# Altium PCB ESP32_HID.PcbDoc
Units mm, origin at the board's own origin, x right, y up, seen from the top; angles counter-clockwise.
Board outline 200 x 80 mm, 2 copper layers (Top Layer, Bottom Layer), stack 1.569 mm thick; 48 components, 73 nets, 309 pads, 66 vias.
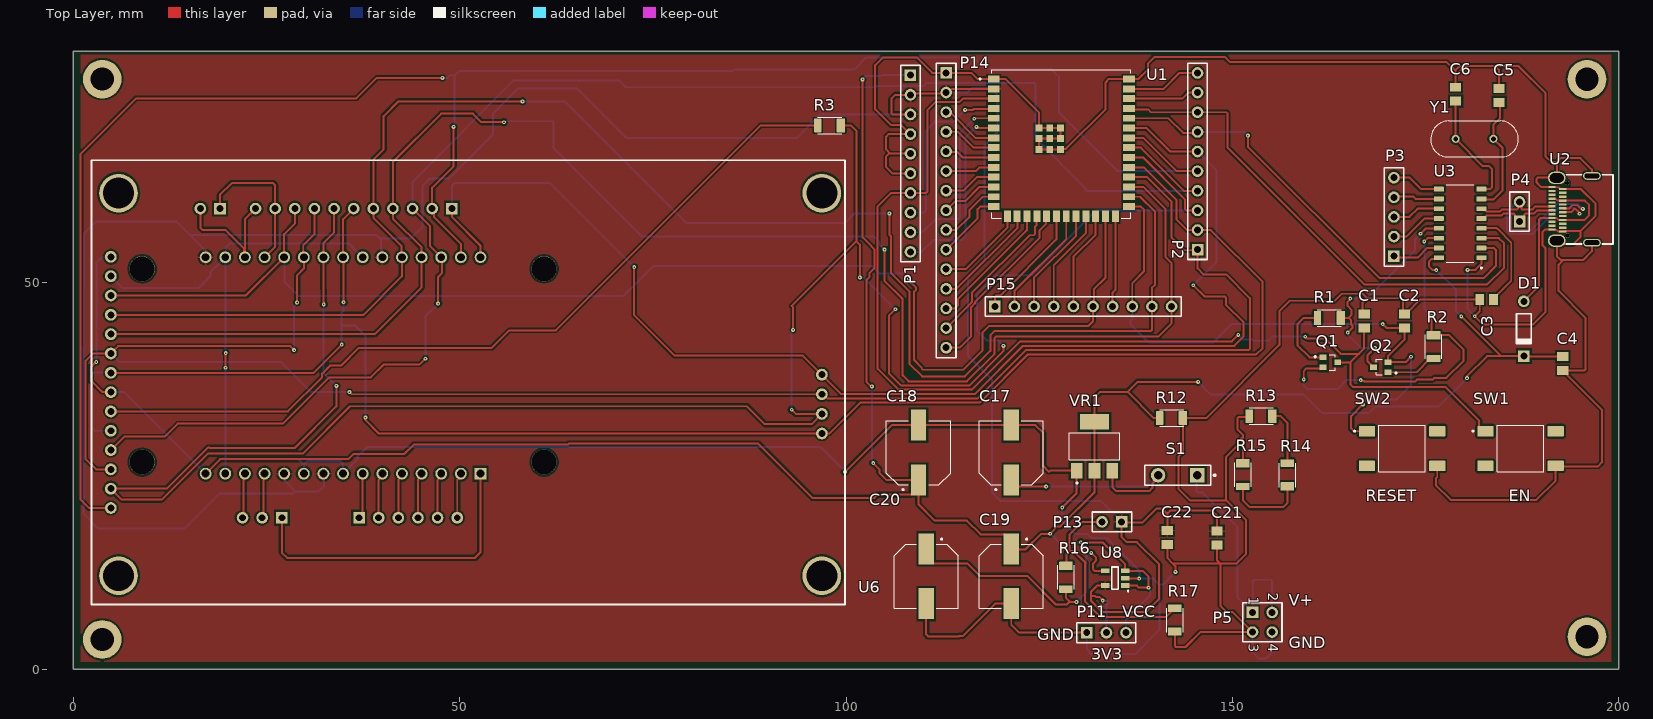
[diagram p0: Top Layer view]
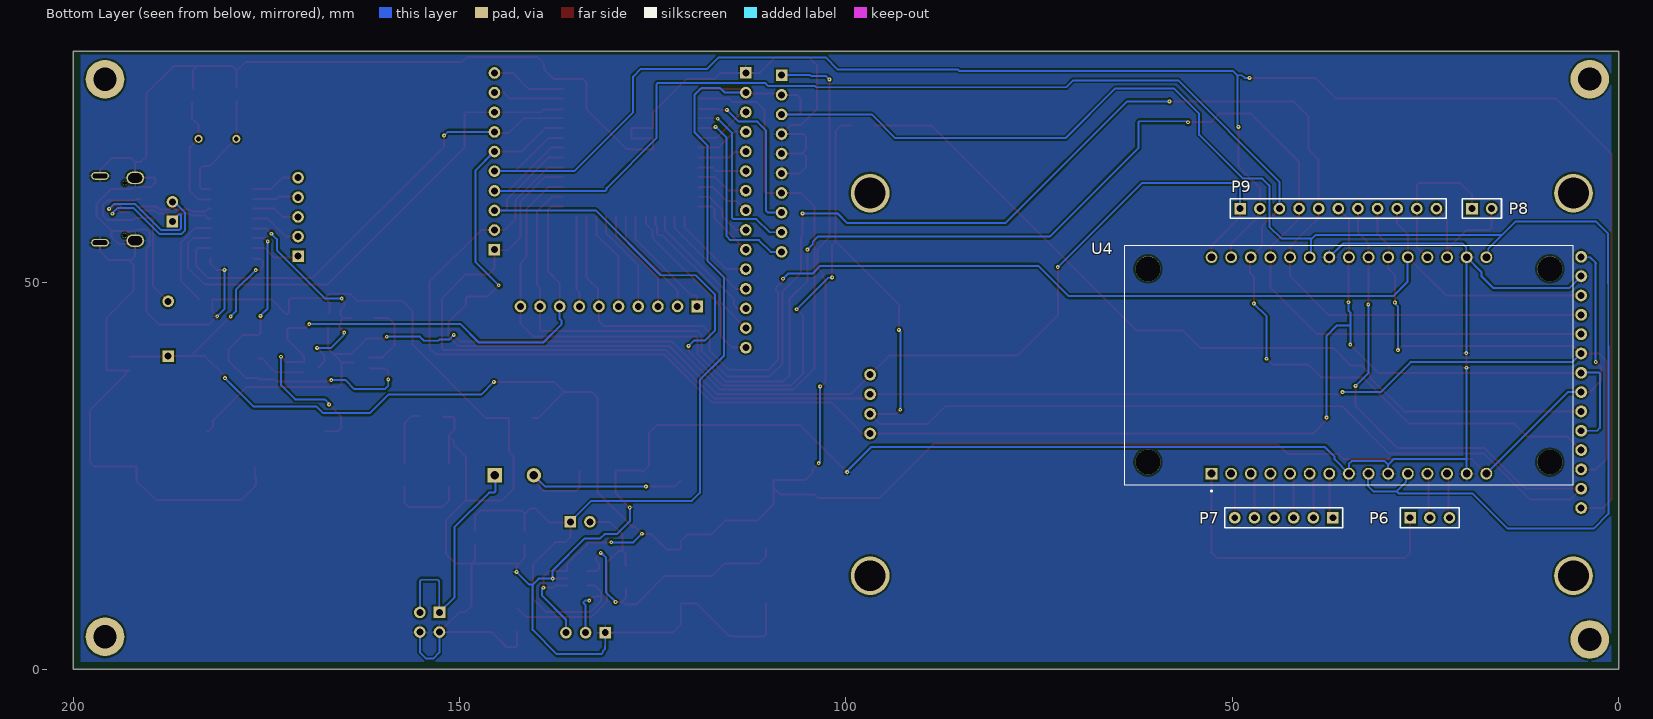
[diagram p1: Bottom Layer view, seen from below]

## Layer stack, top to bottom
Top Solder: solder mask 0.0254, SM-001, Dk 4
Top Layer: signal copper 0.035
Dielectric 1: core 1.4986, Core-043, Dk 4.3
Bottom Layer: signal copper 0.035
Bottom Solder: solder mask 0.0254, SM-001, Dk 4

## Board outline
0,0 200,0 200,80 0,80

## Design rules (kind name [scope] priority, off if disabled: settings)
Clearance [All] p1: gap=0.254 ignorepadtopadclearanceinfootprint=FALSE except(0: Arc-Hole Track-Hole SMDPad-Hole THPad-Hole Via-Hole Fill-Hole Poly-Hole Region-Hole Text-Hole; 0.127: Arc-Arc Arc-Track Arc-SMDPad Track-Track Track-SMDPad SMDPad-SMDPad SMDPad-THPad; 0.2: Arc-THPad Track-THPad)
DiffPairsRouting [All] p1: maxlimit=0.254 minlimit=0.127 mostfreqgap=0.254 toplayer_minwidth=0.254 toplayer_maxwidth=0.381 toplayer_prefwidth=0.381 bottomlayer_minwidth=0.254 bottomlayer_maxwidth=0.381 bottomlayer_prefwidth=0.381 maxuncoupledlength=12.7
MinimumSolderMaskSliver [All] p1: minsoldermaskwidth=0.08
PolygonConnect [All] p1: connectstyle=Relief reliefconductorwidth=0.254 reliefentries=4 polygonreliefangle="90 Angle" airgapwidth=0.254
RoomDefinition U_USB [InComponentClass('U_USB')] p1: confinementstyle=ConfineIn formatcopy=TRUE lockcomponents=FALSE outline 160.011,44.056 160.011,46.894 165.771,46.894 165.771,47.104 169.267,47.104 169.267,65.247 175.046,65.247 175.046,71.514 177.596,71.514 177.596,76.454 180.154,76.454 180.154,76.304 185.779,76.304 185.779,71.514 187.604,71.514 187.604,64.75 199.6,64.75 199.6,54.318 194.004,54.318 194.004,37.546 193.454,37.546 193.454,23.321 165.345,23.321 165.345,38.196 160.255,38.196 160.255,44.056
RoomDefinition U_ESP32_S2_solo [InComponentClass('U_ESP32_S2_solo')] p2: confinementstyle=ConfineIn formatcopy=TRUE lockcomponents=FALSE outline 114.584,40.001 111.336,40.001 111.336,52.401 106.711,52.401 106.711,78.509 111.336,78.509 111.336,78.809 114.584,78.809 114.584,78.794 147.109,78.794 147.109,52.686 143.744,52.686 143.744,45.336 114.584,45.336
RoomDefinition "U_Power Regulation" [InComponentClass('U_Power Regulation')] p3: confinementstyle=ConfineIn formatcopy=TRUE lockcomponents=FALSE outline 104.7,21.975 104.7,34.133 151.161,34.133 151.161,34.194 156.239,34.194 156.239,27.689 158.519,27.689 158.519,22.611 156.764,22.611 156.764,2.007 150.976,2.007 150.976,3.126 129.526,3.126 129.526,5.975 105.7,5.975 105.7,21.975
RoomDefinition U_NodeMCU [InComponentClass('U_NodeMCU')] p4: confinementstyle=ConfineIn formatcopy=TRUE lockcomponents=FALSE outline 4,22.624 4,55.357 14.836,55.357 14.836,61.248 21.976,61.248 50.624,61.248 50.624,55.357 64.458,55.357 64.458,22.624 51.324,22.624 51.324,18 28.624,18 20.296,18 20.296,22.624
RoomDefinition GLCD [InComponentClass('GLCD')] p5: confinementstyle=ConfineIn formatcopy=TRUE lockcomponents=FALSE outline 2,8 2,66.262 95.342,66.262 95.342,71.8 100.42,71.8 100.42,68.962 100.262,68.962 100.262,8
RoutingVias [All] p1: holewidth=0.2 width=0.5 viastyle="Through Hole" minholewidth=0.15 minwidth=0.2 maxholewidth=0.2 maxwidth=0.5
SolderMaskExpansion [All] p1: expansion=0.102 istentingtop=FALSE
UnRoutedNet [All] p1: checkbadconnections=TRUE
Width Width_1 [All] p1: maxlimit=0.254 minlimit=0.13 preferedwidth=0.254
27 further rules are at their usual default settings.

## Classes and differential pairs
component class "U_Power Regulation": C17 C18 C19 C20 C21 C22 P5 P11 P13 R12 R13 R14 R15 R16 R17 S1 U8 VR1
component class U_NodeMCU: P6 P7 P8 P9 U4
component class U_USB: C1 C2 C3 C4 C5 C6 D1 P3 P4 Q1 Q2 R1 R2 SW1 SW2 U2 U3 Y1
component class GLCD: R3 U6
component class U_ESP32_S2_solo: P1 P2 P14 P15 U1
differential pair D: +D_P -D_N

## Components (designator, comment, footprint, x,y, rotation, side; value= is the part's Value field where it differs from the comment)
C1 "0.1uf" CAPC2012X140N 167.05,45.075 r90 top
C2 "0.1uf" CAPC2012X140N 172.275,45.075 r90 top
C3 "0.1uf" CAPC2012X140N 182.9,47.875 r0 top
C4 "0.1uf" CAPC2012X140N 192.725,39.575 r90 top
C5 "33pf" CAPC2012X140N 184.5,74.275 r90 top
C6 "33pf" CAPC2012X140N 178.875,74.425 r90 top
C17 "EEEHA1V101UP" CAP_EEEHA1V101UP 121.379,28.054 r90 top
C18 "EEEHA1V101UP" CAP_EEEHA1V101UP 109.379,28.054 r90 top
C19 "EEEHA1V101UP" CAP_EEEHA1V101UP 121.379,12.054 r270 top
C20 "EEEHA1V101UP" CAP_EEEHA1V101UP 110.379,12.054 r270 top
C21 "0.1uf" CAPC2012X140N 148,17 r90 top
C22 "0.1uf" CAPC2012X140N 141.575,17.075 r90 top
D1 "Diode 1N4148" DO-35 187.7,44.075 r270 top
P1 "Header 10" HDR1X10 108.335,76.885 r270 top
P2 "Header 10" HDR1X10 145.485,54.31 r90 top
P3 "Header 5" HDR1X5 170.891,53.463 r90 top
P4 "Header 2" HDR1X2 187.147,57.959 r90 top
P5 "Header 2X2" HDR2X2 152.6,7.375 r270 top
P6 "Header 3" HDR1X3 27,19.624 r180 bottom
P7 "Header 6" HDR1X6 37,19.624 r0 bottom
P8 "Header 2" HDR1X2 19,59.624 r180 bottom
P9 "Header 11" HDR1X11 49,59.624 r180 bottom
P11 "Header 3" HDR1X3 131.15,4.75 r0 top
P13 "Header 2" HDR1X2 135.675,19.1 r180 top
P14 "Header 15" HDR1X15 112.96,77.185 r270 top
P15 "Header 10" HDR1X10 119.26,46.96 r0 top
Q1 "BC846BW_RF" TRANS_BC846BW_RF 162.675,39.725 r0 top
Q2 "BC846BW_RF" TRANS_BC846BW_RF 169.2,39.1 r180 top
R1 "10k" RESC3115X65N 162.55,45.475 r180 top
R2 "10k" RESC3115X65N 176.025,41.775 r270 top
R3 "10k" RESC3115X65N 97.881,70.381 r180 top
R12 "1k" RESC3115X65N 142.125,32.525 r180 top
R13 "1k" RESC3115X65N 153.7,32.775 r180 top
R14 "1k" RESC3115X65N 157.1,25.15 r90 top
R15 "1k" RESC3115X65N 151.35,25.2 r270 top
R16 "0 ohm" RESC3115X65N 128.45,11.925 r270 top
R17 "1k" RESC3115X65N 142.55,6.375 r90 top
S1 "SW-SPST" SPST-2 142.925,25.125 r180 top
SW1 "FSM4JSMA" TE_FSM4JSMA 187.275,28.575 r0 top
SW2 "FSM4JSMA" TE_FSM4JSMA 171.95,28.575 r0 top
U1 "ESP32-S2-SOLO-U-N4R2" XCVR_ESP32-S2-SOLO-U-N4R2 127.86,67.985 r0 top
U2 "USB-TYPE-C-FEMAIL" C5156605 195.199,60.423 r90 top
U3 "CH340G" SOIC127P600X180-16N 179.451,57.705 r180 top
U4 "VMA107" MODULE_VMA107 34.929,39.328 r90 bottom
U6 "3.5 Inch TFT LCD Module With Touch" PCBCOMPONENT_1 4.881,53.381 r0 top
U8 "MIC5205-2.5YM5-TR" SOT95P280X145-5N 134.825,11.8 r180 top
VR1 "NCP1117STAT3G" VREG_NCP1117STAT3G 132.15,28.875 r90 top
Y1 "12MHZ" XTAL_ECS-51-S-1 181.325,68.65 r0 top

## Footprints (in the part's own frame and the unit in brackets; to place one, negate y for a bottom-side part, rotate by r counter-clockwise, add the part's x,y. Pads: shape width x height; smd on the part's side, far side on the other; paste and mask are expansions set on the pad)
C5156605 [mm] "USB-C-FMAIL"
  oval 1x2.3 hole 0.6 slot 1.9 at 90 deg: 15(-5.209,-1.318) 16(3.431,-1.318)
  oval 1.6x2.3 hole 1.2 slot 1.8 at 90 deg: 17(3.171,3.232) 18(-4.949,3.232)
  rect 0.3x0.95 smd: A1(-3.514,3.858) A2(-3.014,3.858) A3(-2.514,3.858) A4(-2.014,3.858) A5(-1.514,3.858) A6(-1.014,3.858) A7(-0.514,3.858) A8(-0.014,3.858) A9(0.486,3.858) A10(0.986,3.858) A11(1.486,3.858) A12(1.986,3.858) B1(1.736,2.458) B2(1.236,2.458) B3(0.736,2.458) B4(0.236,2.458) B5(-0.264,2.458) B6(-0.764,2.458) B7(-1.264,2.458) B8(-1.764,2.458) B9(-2.264,2.458) B10(-2.764,2.458) B11(-3.264,2.458) B12(-3.764,2.458)
  round 0.55 hole 0.55 unplated: ""(-4.289,1.882) ""(2.511,1.882)
  silkscreen extent -5.36,-4.02 3.58,2.01
CAP_EEEHA1V101UP [mm]
  rect 4x2 smd: 1(-3.55,0) 2(3.55,0)
  silkscreen extent -4.9,-4.15 4.15,4.15, body extent -4.85,-4.15 4.85,4.15, height 10.2
CAPC2012X140N [mm]
  rect 1.15x1.45 smd: 1(-0.9,0) 2(0.9,0)
  body extent -1,-0.63 1,0.63, height 0.94
DO-35 [mm] "Diode, Axial; Body 3.8 x 1.9 mm (LxDia. max), Lead Dia. 0.53 mm (max)"
  round 1.5 hole 0.9: 1(-3.55,0)
  rect 1.5x1.5 hole 0.9: 2(3.55,0)
  silkscreen extent -1.95,-0.95 2.05,0.95
HDR1X2 [mm] "Connector; Header; 2 Position"
  rect 1.5x1.5 hole 0.9: 1(0,0)
  round 1.5 hole 0.9: 2(2.54,0)
  silkscreen extent -1.27,-1.27 3.81,1.27
HDR1X3 [mm] "Connector; Header; 3 Position"
  rect 1.5x1.5 hole 0.9: 1(0,0)
  round 1.5 hole 0.9: 2(2.54,0) 3(5.08,0)
  silkscreen extent -1.27,-1.27 6.35,1.27
HDR1X5 [mm] "Connector; Header; 5 Position"
  rect 1.5x1.5 hole 0.9: 1(0,0)
  round 1.5 hole 0.9: 2(2.54,0) 3(5.08,0) 4(7.62,0) 5(10.16,0)
  silkscreen extent -1.27,-1.27 11.43,1.27
HDR1X6 [mm] "Connector; Header; 6 Position"
  rect 1.5x1.5 hole 0.9: 1(0,0)
  round 1.5 hole 0.9: 2(2.54,0) 3(5.08,0) 4(7.62,0) 5(10.16,0) 6(12.7,0)
  silkscreen extent -1.27,-1.27 13.97,1.27
HDR1X10 [mm] "Connector; Header; 10 Position"
  rect 1.5x1.5 hole 0.9: 1(0,0)
  round 1.5 hole 0.9: 2(2.54,0) 3(5.08,0) 4(7.62,0) 5(10.16,0) 6(12.7,0) 7(15.24,0) 8(17.78,0) 9(20.32,0) 10(22.86,0)
  silkscreen extent -1.27,-1.27 24.13,1.27
HDR1X11 [mm] "Connector; Header; 11 Position"
  rect 1.5x1.5 hole 0.9: 1(0,0)
  round 1.5 hole 0.9: 2(2.54,0) 3(5.08,0) 4(7.62,0) 5(10.16,0) 6(12.7,0) 7(15.24,0) 8(17.78,0) 9(20.32,0) 10(22.86,0) 11(25.4,0)
  silkscreen extent -1.27,-1.27 26.67,1.27
HDR1X15 [mm] "Connector; Header; 15 Position"
  rect 1.5x1.5 hole 0.9: 1(0,0)
  round 1.5 hole 0.9: 2(2.54,0) 3(5.08,0) 4(7.62,0) 5(10.16,0) 6(12.7,0) 7(15.24,0) 8(17.78,0) 9(20.32,0) 10(22.86,0) 11(25.4,0) 12(27.94,0) 13(30.48,0) 14(33.02,0) 15(35.56,0)
  silkscreen extent -1.27,-1.27 36.83,1.27
HDR2X2 [mm] "Connector; Header; 2x2 Position"
  rect 1.5x1.5 hole 0.9: 1(0,0)
  round 1.5 hole 0.9: 2(0,2.54) 3(2.54,0) 4(2.54,2.54)
  silkscreen extent -1.27,-1.27 3.81,3.81
MODULE_VMA107 [mm]
  rect 1.53x1.53 hole 1.02: 1(-14,17.78)
  round 1.53 hole 1.02: 2(-14,15.24) 3(-14,12.7) 4(-14,10.16) 5(-14,7.62) 6(-14,5.08) 7(-14,2.54) 8(-14,0) 9(-14,-2.54) 10(-14,-5.08) 11(-14,-7.62) 12(-14,-10.16) 13(-14,-12.7) 14(-14,-15.24) 15(-14,-17.78) 16(14,-17.78) 17(14,-15.24) 18(14,-12.7) 19(14,-10.16) 20(14,-7.62) 21(14,-5.08) 22(14,-2.54) 23(14,0) 24(14,2.54) 25(14,5.08) 26(14,7.62) 27(14,10.16) 28(14,12.7) 29(14,15.24) 30(14,17.78)
  round 3.25 hole 3.25 unplated: ""(-12.5,-26) ""(-12.5,26) ""(12.5,-26) ""(12.5,26)
  silkscreen extent -16.35,-29 15.5,29
PCBCOMPONENT_1 [mm]
  round 1.524 hole 0.9: 1(0,0) 2(0,-2.5) 3(0,-5) 4(0,-7.5) 5(0,-10) 6(0,-12.5) 7(0,-15) 8(0,-17.5) 9(0,-20) 10(0,-22.5) 11(0,-25) 12(0,-27.5) 13(0,-30) 14(0,-32.5) 15(92,-22.86) 16(92,-20.32) 17(92,-17.78) 18(92,-15.24)
  round 5 hole 4: ""(1,-41.26) ""(1,8.24) ""(92,-41.26) ""(92,8.24)
  silkscreen extent -2.5,-45 95,12.5
RESC3115X65N [mm]
  rrect14% 1.09x1.77 smd: 1(-1.465,0)
  rrect14% 0.94x1.77 smd: 2(1.54,0)
  silkscreen extent -1.55,-1.07 1.55,1.06
SOIC127P600X180-16N [mm]
  rrect25% 1.31x0.62 smd: 1(-2.75,4.445) 2(-2.75,3.175) 3(-2.75,1.905) 4(-2.75,0.635) 5(-2.75,-0.635) 6(-2.75,-1.905) 7(-2.75,-3.175) 8(-2.75,-4.445) 9(2.75,-4.445) 10(2.75,-3.175) 11(2.75,-1.905) 12(2.75,-0.635) 13(2.75,0.635) 14(2.75,1.905) 15(2.75,3.175) 16(2.75,4.445)
  silkscreen extent -2.85,-5 1.77,5.85, body extent -3,-5 3,5, height 1.8
SOT95P280X145-5N [mm]
  rect 1.1x0.6 smd: 1(-1.3,0.95) 2(-1.3,0) 3(-1.3,-0.95) 4(1.3,-0.95) 5(1.3,0.95)
  silkscreen extent -1.78,-1.45 0.42,1.77, body extent -1.45,-1.35 1.45,1.35, height 1.45
SPST-2 [mm] "Switch; 2 Leads"
  rect 1.85x1.85 hole 1.1: 1(-2.54,0)
  round 1.85 hole 1.1: 2(2.54,0)
  silkscreen extent -4.89,-1.27 4.28,1.27
TE_FSM4JSMA [mm]
  rrect15% 2.1x1.38 smd: 1(-4.55,2.24) 2(4.55,2.24) 3(-4.55,-2.24) 4(4.55,-2.24)
  silkscreen extent -6.25,-3 3,3, body extent -3,-5 3,5, height 4.98
TRANS_BC846BW_RF [mm]
  rect 0.9x0.7 smd: 1(-0.95,0.65) 2(-0.95,-0.65) 3(0.95,0)
  silkscreen extent -2.07,-1 0.62,1, body extent -1.05,-1 1.05,1, height 1.1
VREG_NCP1117STAT3G [mm]
  rect 2x1.5 smd: 1(-3.15,2.3) 2(-3.15,0) 3(-3.15,-2.3)
  rect 2x3.8 smd: 4(3.15,0)
  silkscreen extent -4.85,-3.25 1.75,3.25, body extent -3.5,-3.25 3.5,3.25, height 1.8
XCVR_ESP32-S2-SOLO-U-N4R2 [mm]
  rect 1.5x0.9 smd: 1(-8.75,8.41) 2(-8.75,7.14) 3(-8.75,5.87) 4(-8.75,4.6) 5(-8.75,3.33) 6(-8.75,2.06) 7(-8.75,0.79) 8(-8.75,-0.48) 9(-8.75,-1.75) 10(-8.75,-3.02) 11(-8.75,-4.29) 12(-8.75,-5.56) 13(-8.75,-6.83) 14(-8.75,-8.1) 27(8.75,-8.1) 28(8.75,-6.83) 29(8.75,-5.56) 30(8.75,-4.29) 31(8.75,-3.02) 32(8.75,-1.75) 33(8.75,-0.48) 34(8.75,0.79) 35(8.75,2.06) 36(8.75,3.33) 37(8.75,4.6) 38(8.75,5.87) 39(8.75,7.14) 40(8.75,8.41)
  rect 0.9x1.5 smd: 15(-6.985,-9.35) 16(-5.715,-9.35) 17(-4.445,-9.35) 18(-3.175,-9.35) 19(-1.905,-9.35) 20(-0.635,-9.35) 21(0.635,-9.35) 22(1.905,-9.35) 23(3.175,-9.35) 24(4.445,-9.35) 25(5.715,-9.35) 26(6.985,-9.35)
  rect 0.9x0.9 smd: 41_1(-2.9,2.09) 41_2(-1.5,2.09) 41_3(-0.1,2.09) 41_4(-2.9,0.69) 41_5(-1.5,0.69) 41_6(-0.1,0.69) 41_7(-2.9,-0.71) 41_8(-1.5,-0.71) 41_9(-0.1,-0.71)
  silkscreen extent -10.6,-9.6 9,9.6
XTAL_ECS-51-S-1 [mm]
  round 1.03 hole 0.63: 1(-2.44,0) 2(2.44,0)
  silkscreen extent -5.68,-2.33 5.68,2.33, body extent -5.47,-2.5 5.88,2.5, height 13.46

## Part data
C1 C2 C3 C4 C5 C6 C21 C22: library part LD051A121KAB2A, "120PF 100V 10% 0805", Package=None, Availability=Unavailable, MF="{'manufacturer': u'AVX'}", MP=LD051A121KAB2A, Price=None
C17 C18 C19 C20 Q1 Q2 U1 U3: Package=None, Availability=Unavailable, Price=None
  C17 C18 C19 C20: MF="{'manufacturer': u'Panasonic'}", MP=EEEHA1V101UP
  Q1 Q2: MF="{'manufacturer': u'Taiwan Semiconductor'}", MP=BC846BW_RF
  U1: MF="{'manufacturer': u'Espressif Systems'}", MP=ESP32-S2-SOLO-U-N4R2
  U3: MF="{'manufacturer': u'WCH'}", MP=CH340G
D1: "High Conductance Fast Diode", Code_JEDEC=DO-204-AH, ComponentLink1Description="Manufacturer Link", ComponentLink1URL=http://www.fairchildsemi.com/, ComponentLink2Description=Datasheet, ComponentLink2URL=http://www.fairchildsemi.com/ds/1N%2F1N4148.pdf, DatasheetVersion=1997, LatestRevisionDate=17-Jul-2002, LatestRevisionNote="Re-released for DXP Platform.", PackageDescription="Diode, Axial; Body 3.8 x 1.9 mm (LxDia. max), Lead Dia. 0.53 mm (max)", PackageReference=DO-35, Published=8-Jun-2000, Publisher="Altium Limited"
P1 P2 P15: "Header, 10-Pin", LatestRevisionDate=17-Jul-2002, LatestRevisionNote="Re-released for DXP Platform.", Publisher="Altium Limited"
P3: "Header, 5-Pin", LatestRevisionDate=17-Jul-2002, LatestRevisionNote="Re-released for DXP Platform.", Publisher="Altium Limited"
P4 P8 P13: "Header, 2-Pin", LatestRevisionDate=17-Jul-2002, LatestRevisionNote="Re-released for DXP Platform.", Publisher="Altium Limited"
P5: "Header, 2-Pin, Dual row", LatestRevisionDate=17-Jul-2002, LatestRevisionNote="Re-released for DXP Platform.", Publisher="Altium Limited"
P6 P11: "Header, 3-Pin", LatestRevisionDate=17-Jul-2002, LatestRevisionNote="Re-released for DXP Platform.", Publisher="Altium Limited"
P7: "Header, 6-Pin", LatestRevisionDate=17-Jul-2002, LatestRevisionNote="Re-released for DXP Platform.", Publisher="Altium Limited"
P9: "Header, 11-Pin", LatestRevisionDate=17-Jul-2002, LatestRevisionNote="Re-released for DXP Platform.", Publisher="Altium Limited"
P14: "Header, 15-Pin", LatestRevisionDate=17-Jul-2002, LatestRevisionNote="Re-released for DXP Platform.", Publisher="Altium Limited"
R1 R2 R3 R12 R13 R14 R15 R16 R17: library part 1-1879462-4, "RL73H 2B R43 1% 10 RL", Package=None, Availability=Unavailable, MF="{'manufacturer': u'TE Connectivity'}", MP=1-1879462-4, Price=None
S1: "Single-Pole, Single-Throw Switch", LatestRevisionDate=17-Jul-2002, LatestRevisionNote="Re-released for DXP Platform.", PackageDescription="Switch; 2 Leads", PackageReference=SPST-2, Published=24-Mar-1999, Publisher="Altium Limited"
SW1 SW2: "Switch Tactile OFF (ON) SPST Round Button Gull Wing 0.05A 24VDC 2.6N SMD T/R", Package=None, Availability=Unavailable, MF="{'manufacturer': u'TE Connectivity'}", MP=FSM4JSMA, Price=None
U4: "NodeMCU V2 Lua Based ESP8266 Development Board", Package=None, Availability=Unavailable, MF="{'manufacturer': u'Velleman'}", MP=VMA107, Price=None
U6: library part ILI9488, ComponentLink1Description="New link", ComponentLink1URL=https://www.aliexpress.com/item/32954128438.html?spm=a2g0o.order_list.order_list_main.44.5fd61802HfjXd0
U8: "MIC5205 Series 3 V Fixed Output 150 mA SMT Low-Noise LDO Regulator - SOT-23-5", Package=None, Availability=Unavailable, MF="{'manufacturer': u'Microchip Technology'}", MP=MIC5205-2.5YM5-TR, Price=None
VR1: "Linear Voltage Regulator IC 1 Output 1A SOT-223", Package=None, Availability=Unavailable, MF="{'manufacturer': u'ON Semiconductor'}", MP=NCP1117STAT3G, Price=None
Y1: library part ECS-51-S-1, Package=None, Availability=Unavailable, MF="{'manufacturer': u'ECS'}", MP=ECS-51-S-1, Price=None

## Free pads (board coordinates)
  round 5 hole 3: 22(3.775,76.375) 23(195.875,76.35) 24(195.875,4.225) 25(3.775,3.875)

## Via types
v1: diameter 0.5, hole 0.2, Top Layer to Bottom Layer, 66 vias

## Nets (pads, with @x,y where several pads share a name; then routed paths per layer and width w, separated by ;. In a path a pad name is that pad's centre, name@x,y a point inside that pad or via, vN(x,y) a via of type N, cw(c..) or ccw(c..) an arc to the next point about the centre after c; other vN are vias at no path point)
3V3: C21.2 C22.2 P1.2 P1.3 P11.2 P13.1 P14.2 U1.2 U4.9 U4.11 U4.16 U4.25 U8.5 | length 355.4
  Top Layer w0.254: P1.3 106.024,71.805 105.875,71.954 105.875,73.825 106.395,74.345 P1.2 108.485,74.495 112.81,74.495 P14.2 113.297,74.645 113.777,75.125 U1.2 ; v1(133.225,8.9) 132.75,9.375 132.325,9.375 132.213,9.487 131.7,9.487 ; U8.5 132.475,10.85 131.7,10.075 131.7,9.487 ; C22.2 141.575,20.175 ; C21.2 148,19.875 147.325,20.55 141.95,20.55 141.575,20.175 ; 131.7,9.487 131.7,8.9 133.175,7.425 138.8,7.425 140.5,9.125 140.5,13.6 137.625,16.475 136.3,16.475 135.675,17.1 P13.1 135.775,19 138.35,19 140.15,20.8 140.9,20.8 141.525,20.175 141.575,20.175
  Bottom Layer w0.254: U4.16 16.905,53.572 16.905,54.445 15.152,56.198 ; U4.11 27.553,25.084 27.553,24.222 28.75,23.025 ; U4.9 32.389,25.039 32.3,24.95 32.45,24.8 32.45,23.7 31.775,23.025 28.75,23.025 ; U4.25 39.85,53.487 39.85,55.725 ; P1.3 96.68,71.805 93.625,68.75 71.6,68.75 65.175,75.175 57.575,75.175 54.3,71.9 54.3,69.175 48.625,63.5 46.125,63.5 45.213,62.587 45.213,57.288 43.65,55.725 39.85,55.725 ; P14.2 115.709,74.645 116.289,75.225 118.7,75.225 119.6,74.325 119.6,69.475 117.925,67.8 117.925,52.85 115.8,50.725 115.8,40.55 118.9,37.45 118.9,22.85 119.95,21.8 132.975,21.8 P13.1 ; v1(133.225,8.9) 133.792,8.9 133.941,8.751 133.941,8.541 133.69,8.29 P11.2 ; 15.152,56.198 13.4,57.95 2.95,57.95 1.85,56.85 1.85,56.825 1.4,56.375 1.4,49.9 1.375,49.875 1.375,41.875 1.35,41.85 1.35,20.125 3.25,18.225 14.4,18.225 18.95,22.775 28.5,22.775 28.75,23.025 ; 15.152,56.198 39.277,56.198 39.8,55.675 39.85,55.725
AIN1: P14.3 U1.7 | length 7.5
  Top Layer w0.254: P14.3 113.198,71.867 113.658,71.867 116.75,68.775 U1.7
AIN1_2: P15.2 U1.21 | length 14.4
  Top Layer w0.254: P15.2 121.8,48.975 128.495,55.67 U1.21
AIN2: P1.10 U1.6 | length 25
  Top Layer w0.254: v1(116.875,70.2) 117.03,70.045 U1.6
  Bottom Layer w0.254: P1.10 109.75,54.025 111.275,55.55 114.95,55.55 115.45,56.05 115.45,68.775 v1(116.875,70.2)
AIN2_2: P15.1 U1.20 | length 15.3
  Top Layer w0.254: P15.1 119.26,48.21 119.41,48.36 119.935,48.36 127.225,55.65 U1.20
BIN1: P1.9 U1.5 | length 23.3
  Top Layer w0.254: v1(116.6,71.25) 116.665,71.315 U1.5
  Bottom Layer w0.254: P1.9 109.89,56.565 111.6,58.275 114.576,58.275 114.725,58.424 114.725,69.375 v1(116.6,71.25)
BIN1_2: P14.15 U1.19 | length 23.4
  Top Layer w0.254: P14.15 114.7,41.625 116.2,43.125 116.2,46.866 116.681,47.347 116.681,47.481 125.01,55.81 125.01,56.76 125.903,57.653 125.903,58.583 U1.19
BIN2: P1.8 U1.4 | length 22.5
  Top Layer w0.254: v1(115.4,72.4) 116.425,72.4 116.55,72.525 119.05,72.525 U1.4
  Bottom Layer w0.254: P1.8 110.105,59.105 110.325,59.325 110.325,69.725 111.475,70.875 113.875,70.875 v1(115.4,72.4)
BIN2_2: P14.14 U1.18 | length 19.6
  Top Layer w0.254: P14.14 116.3,47.505 116.3,48.725 123.75,56.175 124.301,56.175 124.45,56.324 124.45,57.275 124.675,57.5 124.675,58.625 U1.18
D9: P8.1 P9.10 U4.19 | length 19.6
  Top Layer w0.254: P8.1 19,61.4 20.525,62.925 25.876,62.925 26.14,62.661 P9.10 26.14,54.699 U4.19
D10: P8.2 P9.11 U4.18 | length 17.3
  Top Layer w0.254: P8.2 16.46,57.14 16.725,56.875 19.7,56.875 22.101,54.474 22.101,53.456 U4.18 22.229,58.253 P9.11
D_N: P4.2 U2.A7 U2.B7 U3.6 | length 29.7
  Top Layer w0.254: U3.6 182.546,59.61 182.729,59.427 182.729,59.378 182.878,59.229 184.591,59.229 184.845,59.483 186.774,59.483 186.923,59.632 186.923,60.275 P4.2 187.371,60.275 187.371,59.632 187.52,59.483 188.777,59.483 189.203,59.909 U2.A7 ; U2.B7 193.804,59.159 194.201,59.556 194.412,59.556 194.784,59.183 194.784,59.154 194.907,59.031 v1(194.907,58.965)
  Bottom Layer w0.254: P4.2 186.93,60.499 185.508,59.077 185.508,56.841 186.029,56.32 188.795,56.32 192.16,59.685 194.281,59.685 194.86,59.106 194.86,59.012 v1(194.907,58.965)
D_P: P4.1 U2.A6 U2.B6 U3.5 | length 28.2
  Top Layer w0.254: U3.5 182.546,58.34 182.729,58.523 182.729,58.572 182.878,58.721 184.801,58.721 185.055,58.975 186.409,58.975 186.558,58.826 186.558,58.548 P4.1 187.736,58.548 187.736,58.826 187.885,58.975 188.988,58.975 189.413,59.401 191.333,59.401 U2.A6 ; U2.B6 193.597,59.659 193.994,60.056 194.619,60.056 195.053,59.622 195.303,59.622 v1(195.35,59.575)
  Bottom Layer w0.254: P4.1 186.239,58.867 186.016,58.867 186.016,57.051 186.239,56.828 188.584,56.828 191.949,60.193 194.732,60.193 v1(195.35,59.575)
DCD: P3.2 U3.12 | length 6.8
  Top Layer w0.254: P3.2 172.503,56.003 174.84,58.34 U3.12
DTR: Q2.3 R1.1 U3.13 | length 30.2
  Top Layer w0.254: R1.1 165.025,45.475 ; v1(164.925,43.575) 165.533,44.183 165.533,44.467 165.35,44.65 165.35,45.15 165.025,45.475 ; v1(165.25,47.975) 165.25,47.908 164.9,47.558 164.9,47.025 165.425,46.5 165.425,45.875 165.025,45.475 ; Q2.3 168.15,39.1 167.927,39.323 167.927,39.423 167.475,39.875 167.475,40.65 v1(168.425,41.6) ; v1(174.35,56.375) 175.045,57.07 U3.13
  Bottom Layer w0.254: v1(164.925,43.575) 165.025,43.475 165.025,43.175 166.6,41.6 v1(168.425,41.6) ; v1(165.25,47.975) 167.365,47.975 173.65,54.26 173.65,55.675 v1(174.35,56.375)
EN: C1.1 P1.7 Q1.3 SW1.1 U1.3 | length 145.8
  Top Layer w0.254: U1.3 115.105,73.855 114.65,73.4 111.575,73.4 110.525,72.35 110.525,61.794 110.376,61.645 P1.7 105.845,61.645 104.1,59.9 104.1,38.9 106.8,36.2 116.3,36.2 122.55,42.45 149.925,42.45 v1(150.75,43.275) ; v1(159.425,43.05) 159.675,42.8 162.025,42.8 164,40.825 166.35,40.825 ; Q1.3 165.25,39.725 ; C1.1 167.05,41.525 166.35,40.825 ; SW1.1 182.468,30.815 181.905,31.378 181.905,32.195 177.575,36.525 165.65,36.525 165.25,36.925 165.25,39.725 ; 165.25,39.725 166.35,40.825
  Bottom Layer w0.254: v1(150.75,43.275) 151.351,42.674 152.609,42.674 152.758,42.525 154.6,42.525 155.125,43.05 v1(159.425,43.05)
GLCD_CON1: P9.9 P15.6 U1.25 U4.20 U6.3 | length 171.4
  Top Layer w0.254: U6.3 22.362,48.381 U4.20 27.309,56.309 28.68,57.68 P9.9 ; v1(108.15,50.55) 108.118,50.518 108.118,50.307 109.07,49.355 109.07,49.145 108.8,48.875 108.8,40.05 109.8,39.05 109.8,38.924 109.949,38.775 115.175,38.775 117.675,41.275 117.675,43.6 118.525,44.45 131.375,44.45 131.96,45.035 P15.6 132.085,47.085 132.085,49.21 133.575,50.7 U1.25
  Bottom Layer w0.254: U4.20 27.35,53.287 27.35,50.15 29.2,48.3 71.2,48.3 75.125,52.225 103.325,52.225 104.325,51.225 107.475,51.225 v1(108.15,50.55)
GLCD_CON2: P9.5 P15.9 U1.28 U4.26 U6.4 | length 211.7
  Top Layer w0.254: U6.4 37.581,45.881 42.549,50.849 U4.26 42.5,53.377 42.5,54.775 38.84,58.435 P9.5 38.84,65.94 40.175,67.275 40.175,71.575 42.1,73.5 v1(58.15,73.5) ; v1(105.625,59) 105.625,56.231 105.8,56.056 105.8,51.3 108.2,48.9 108.2,39.575 109.85,37.925 115.375,37.925 118.675,41.225 118.675,43.25 119.199,43.774 139.431,43.774 139.58,43.923 P15.9 139.58,49.355 139.985,49.76 139.985,59.21 138.04,61.155 U1.28
  Bottom Layer w0.254: v1(58.15,73.5) 63.625,73.5 79.35,57.775 99.875,57.775 101.1,59 v1(105.625,59)
GLCD_CON3: P9.4 P15.10 U1.29 U4.27 U6.5 | length 213.9
  Top Layer w0.254: U6.5 39.056,43.381 45.095,49.42 45.095,51.076 45.089,51.082 U4.27 45.089,54.611 41.38,58.32 P9.4 41.38,65.655 47.625,71.9 51.725,71.9 52.825,70.8 v1(55.75,70.8) ; v1(105,54.325) 105,50.25 107.325,47.925 107.325,38.05 108.1,37.275 115.65,37.275 119.225,40.85 119.225,42.901 119.374,43.05 140.375,43.05 142.12,44.795 P15.10 142.12,52.575 141.31,53.385 141.31,59.585 138.47,62.425 U1.29
  Bottom Layer w0.254: v1(55.75,70.8) 55.875,70.925 62.026,70.925 62.175,70.776 62.175,67.45 73.625,56 103.65,56 104.301,55.349 104.301,55.024 v1(105,54.325)
GLCD_CON4: P2.1 P9.8 U1.30 U4.21 U6.6 U6.12 U6.17 | length 249.3
  Top Layer w0.254: U6.12 2.969,25.881 1.6,27.25 1.6,39.875 2.625,40.9 4.862,40.9 U6.6 5.825,41.825 28.1,41.825 v1(28.6,41.325) ; v1(28.975,47.475) 28.975,51 29.849,51.874 U4.21 29.775,53.402 29.775,54.875 31.22,56.32 P9.8 ; v1(35.75,35.875) 36.024,35.601 U6.17 97.114,35.601 97.665,35.05 117,35.05 123.275,41.325 152.101,41.325 152.25,41.474 152.25,48.05 149.175,51.125 146.25,51.125 145.485,51.89 P2.1 145.41,54.235 143.76,54.235 142.135,55.86 142.135,60.51 138.95,63.695 U1.30
  Bottom Layer w0.254: U6.6 6.012,39.75 26.95,39.75 30.825,35.875 v1(35.75,35.875) ; v1(28.6,41.325) 28.6,46.975 28.975,47.35 v1(28.975,47.475)
GLCD_CON5: P2.2 P9.6 U1.31 U4.23 U6.7 U6.10 U6.15 | length 231.2
  Top Layer w0.254: U6.7 31.106,38.381 v1(34.75,42.025) ; v1(35,47.5) 34.964,47.536 34.964,53.292 U4.23 34.929,58.253 P9.6 ; v1(37.825,32.575) 37.78,32.53 37.78,32.32 39.579,30.521 U6.15 96.91,30.55 97.875,30.55 101.85,34.525 117.325,34.525 123.55,40.75 153.075,40.75 153.9,41.575 153.9,50.15 147.2,56.85 P2.2 144.145,56.85 142.735,58.26 142.735,60.76 138.53,64.965 U1.31
  Bottom Layer w0.254: U6.10 2.819,30.881 2.45,31.25 2.45,38.276 2.599,38.425 4.837,38.425 U6.7 ; v1(34.75,42.025) 34.75,44.5 ; v1(35,47.5) 34.975,47.475 34.975,46.394 34.75,46.169 34.75,44.5 ; v1(37.825,32.575) 37.825,43.15 36.475,44.5 34.75,44.5
GLCD_CON6: P2.3 P9.7 R3.1 U1.32 U4.22 U6.13 U6.16 | length 297.9
  Top Layer w0.254: v1(32.425,47.225) 32.445,47.245 32.445,47.455 32.425,47.475 32.425,49.175 32.389,49.211 U4.22 32.389,55.164 33.76,56.535 P9.7 ; v1(34.075,36.675) 34.075,34.025 28.7,28.65 17.675,28.65 17.631,28.694 17.42,28.694 12.107,23.381 U6.13 6.287,21.975 11.475,21.975 17.425,27.925 29.7,27.925 35.825,34.05 87.175,34.05 89.5,31.725 95.545,31.725 U6.16 93.514,33.061 v1(92.975,33.6) ; v1(93.15,43.925) 93.15,46.85 92.975,47.025 101.35,55.4 ; R3.1 100.644,70.381 101.35,69.675 101.35,55.4 ; v1(101.8,50.725) 101.8,54.95 101.35,55.4 ; v1(106.4,46.6) 105.55,45.75 105.55,38.35 107.175,36.725 115.925,36.725 120.375,41.175 v1(120.375,41.85) ; U1.32 138.435,66.235 143.835,60.835 143.835,59.585 144.03,59.39 P2.3
  Bottom Layer w0.254: v1(32.425,47.225) 32.425,38.325 v1(34.075,36.675) ; v1(92.975,33.6) 92.975,43.75 v1(93.15,43.925) ; v1(101.8,50.725) 101.847,50.678 102.322,50.678 v1(106.4,46.6) ; v1(120.375,41.85) 119.695,42.53 118.27,42.53 116.975,43.825 116.975,48.525 119.45,51 124,51 132.39,59.39 P2.3
GLCD_CON7: P2.4 P9.3 U1.33 U4.28 U6.11 | length 199.7
  Top Layer w0.254: U6.11 6.625,30.125 11.85,30.125 13.525,31.8 27.15,31.8 33.125,37.775 38.525,37.775 40.225,39.475 44.85,39.475 v1(45.575,40.2) ; P9.3 46.2,57.344 46.2,54.757 U4.28 47.75,53.207 47.75,51.3 47.225,50.775 v1(47.225,47.325) ; U1.33 138.14,67.505 143.715,61.93 P2.4
  Bottom Layer w0.254: P9.3 43.92,63.095 57.025,76.2 70.625,76.2 71.5,75.325 103.85,75.325 104.03,75.505 110.105,75.505 110.475,75.875 124.376,75.875 124.525,75.726 124.525,68.725 130.975,62.275 130.975,62.079 131.124,61.93 P2.4 ; v1(45.575,40.2) 45.575,45.675 v1(47.225,47.325)
GLCD_CON8: P2.5 P9.2 U1.34 U4.29 U6.14 | length 245
  Top Layer w0.254: U6.14@4.5,20.575 4.575,20.575 U6.14 2.069,20.881 0.975,21.975 0.975,66.7 8.15,73.875 36.65,73.875 39.3,76.525 v1(47.775,76.525) ; v1(49.225,70.2) 49.225,65.1 46.46,62.335 P9.2 46.698,59.386 46.698,58.527 50.169,55.056 U4.29 ; U1.34 138.47,68.775 142.775,64.47 P2.5
  Bottom Layer w0.254: v1(47.775,76.525) 48.433,76.525 48.783,76.875 49.375,76.875 ; v1(49.225,70.2) 49.375,70.35 49.375,76.875 ; P2.5 135.155,64.47 127.55,72.075 127.55,76.7 126.55,77.7 117.975,77.7 116.475,79.2 102.65,79.2 101.05,77.6 85.5,77.6 85.35,77.45 49.95,77.45 49.375,76.875
GLCD_CON9: P2.6 P9.1 U1.35 U4.30 U6.18 | length 172
  Top Layer w0.254: P9.1 49,58.55 52.709,54.841 U4.30 ; v1(72.6,52.05) 72.6,45.825 77.825,40.6 94.422,40.6 U6.18 99.397,35.625 116.65,35.625 122.9,41.875 150.242,41.875 151.45,43.083 151.45,44.9 149.15,47.2 149.15,48.101 149.001,48.25 146.4,48.25 144.95,49.7 v1(144.925,49.7) ; U1.35 138.9,70.045 141.935,67.01 P2.6
  Bottom Layer w0.254: P9.1 49,62.6 49.325,62.925 61.725,62.925 v1(72.6,52.05) ; v1(144.925,49.7) 147.95,52.725 147.95,64.545 P2.6
GND: C1.2 C2.2 C3.1 C4.1 C5.2 C6.2 C17.2 C18.2 C19.2 C20.2 C21.1 C22.1 P1.4 P1.5 P1.6 P5.3 P5.4 P11.1 P14.1 R12.1 R13.2 R15.1 R17.1 SW1.4 SW2.4 U1.1 U1.40 U1.41_1 U1.41_2 U1.41_3 U1.41_4 U1.41_5 U1.41_6 U1.41_7 U1.41_8 U1.41_9 U2.15 U2.16 U2.17 U2.18 U2.A1 U2.A12 U2.B1 U2.B12 U3.1 U4.8 U4.10 U4.14 U4.17 U4.24 U6.2 U8.2 VR1.1 | length 696.2
  Top Layer w0.254: v1(19.725,39.025) 19.725,40.9 v1(19.75,40.925) ; v1(99.85,25.525) 105.929,31.604 C18.2 C17.2 124.496,31.604 125.5,30.6 125.5,26.326 126.196,25.63 126.33,25.63 126.425,25.725 VR1.1 129.85,22.825 v1(127.975,20.95) ; P1.6 105.99,64.185 105.2,64.975 105.2,66.375 105.55,66.725 105.75,66.725 ; P1.5 105.75,66.725 ; C20.2 110.379,4.521 110.625,4.275 114.6,4.275 114.675,4.35 115.15,4.35 119.304,8.504 C19.2 121.379,5.771 122.4,4.75 P11.1 ; U8.2 136.15,11.775 137.925,11.775 v1(137.95,11.75) ; C22.1 141.575,14.425 142.3,13.7 ; R17.1 142.55,3.049 142.699,2.9 143.925,2.9 145.86,4.835 P5.3 150.01,7.425 149.275,7.425 148.45,8.25 148.45,13.7 ; v1(142.625,12.625) 142.625,13.375 142.3,13.7 ; C21.1 148,14.15 148.45,13.7 ; R15.1 151.35,30.125 ; R13.2 152.035,32.65 150.799,32.65 150.65,32.501 150.65,31.05 151.35,30.35 151.35,30.125 ; C1.2 166.825,46.2 166.825,47.425 167.425,48.025 ; SW2.4 176.5,24.893 176.33,24.724 176.33,23.845 178.25,21.925 189.325,21.925 191.825,24.425 SW1.4 191.885,26.275 197.3,26.275 197.8,26.775 197.8,33.6 193.323,38.077 193.323,38.227 C4.1@192.875,38.675 ; C6.2 178.85,75.35 178.85,77.5 ; v1(180.425,51.7) 181.425,51.7 182.201,52.476 U3.1 ; C5.2 184.5,77.5 183.925,78.075 ; C4.1 C4.1@192.875,38.675 ; U2.15 196.517,54.092 195.4,52.975 192.8,52.975 ; U2.16 196.517,64.658 195.025,66.15 192.45,66.15 191.967,65.667 ; 105.75,66.725 105.425,67.05 105.425,67.065 105.2,67.29 105.2,68.94 105.555,69.295 105.585,69.265 P1.4 107.175,70.425 105.825,70.425 103.775,72.475 103.775,78.175 104.8,79.2 109.125,79.2 111.14,77.185 P14.1 116.215,77.185 117.005,76.395 U1.1 120.63,76.395 124.96,72.065 U1.41_1 U1.41_2 U1.41_3 U1.41_6 U1.41_5 U1.41_4 U1.41_7 U1.41_8 U1.41_9 127.827,67.342 128.442,67.342 133.6,72.5 133.6,75.925 133.75,76.075 133.75,76.15 133.995,76.395 U1.40 137.845,76.395 139.05,77.6 139.05,78.375 139.9,79.225 149.05,79.225 149.7,78.575 177.725,78.575 178.8,77.5 178.85,77.5 ; 142.3,13.7 148.45,13.7 ; 148.45,13.7 150.5,13.7 151.775,14.975 151.775,19.275 149.175,21.875 ; 149.175,21.875 144.5,21.875 143,23.375 143,27.525 143.59,28.115 R12.1 146.6,32.525 156.075,42 156.075,46.35 157.425,47.7 163.225,47.7 164.131,48.606 166.844,48.606 167.425,48.025 ; 149.175,21.875 149.175,27.5 150.75,29.075 150.75,29.525 151.35,30.125 ; 167.425,48.025 171.9,48.025 172.05,47.875 172.05,46.2 C2.2 172.425,45.975 174.325,47.875 C3.1 182,46.35 v1(181.35,45.7) 182.425,44.625 188.875,44.625 190.475,46.225 190.475,54.525 190.125,54.875 190.125,56.625 190.409,56.909 U2.A1 191.364,56.886 191.889,56.886 192.1,56.675 192.725,56.675 U2.B12 193.044,56.659 193.141,56.755 195.055,56.755 ; 178.85,77.5 179.425,78.075 183.925,78.075 ; 183.925,78.075 187,78.075 190.475,74.6 190.475,66.425 191.233,65.667 191.967,65.667 ; 191.967,65.667 U2.17 191.936,63.625 189.499,63.625 189.35,63.476 189.35,63 189.941,62.409 U2.A12 191.364,62.386 192.189,62.386 192.416,62.159 U2.B1 195.066,62.159 197,60.225 197,58.7 195.055,56.755 ; 192.8,52.975 192.2,52.375 192.2,48.975 195.675,45.5 195.675,38.824 195.526,38.675 C4.1@192.875,38.675 ; 192.8,52.975 192.475,52.975 191.967,53.483 U2.18 192.476,55.474 192.925,55.025 194.1,55.025 195.055,55.98 195.055,56.755
  Bottom Layer w0.254: U6.2 6.437,49.325 16.225,49.325 17.775,50.875 17.775,51.414 U4.17 ; U4.14 19.689,27.225 ; v1(19.725,39.025) 19.689,38.989 19.689,27.225 ; v1(19.75,40.925) 19.719,40.956 19.719,53.297 U4.17 ; U4.10 29.849,26.499 ; U4.24 35.697,55.1 20.225,55.1 19.75,54.625 19.75,53.389 U4.17 ; v1(99.85,25.525) 99.85,25.675 96.745,28.78 38.03,28.78 36.775,27.525 36.775,27.174 U4.8 34.929,26.596 34.575,26.95 30.3,26.95 29.849,26.499 ; v1(127.975,20.95) 127.975,19.2 129.663,17.512 131.237,17.512 131.8,16.95 133.8,16.95 137.95,12.8 v1(137.95,11.75) 139.776,11.75 140.55,10.976 ; P11.1 131.15,3.025 131.175,3 131.175,2.675 131.475,2.375 131.475,2.15 131.65,1.975 137.4,1.975 140.55,5.125 140.55,10.976 ; v1(142.625,12.625) 142.625,12.6 141.001,10.976 140.55,10.976 ; P5.3 152.6,2.2 153.4,1.4 154.3,1.4 155.14,2.24 P5.4 ; v1(180.425,51.7) 180.425,46.625 v1(181.35,45.7) ; 19.689,27.225 29.123,27.225 29.849,26.499
IO0: C2.1 P15.8 Q2.2 SW2.1 U1.27 | length 80.8
  Top Layer w0.254: U1.27 138.16,59.885 138.535,59.51 138.535,51.485 137.035,49.985 137.035,46.965 P15.8 ; v1(166.875,34.3) 165.35,32.775 165.35,31.175 165.71,30.815 SW2.1 ; v1(169.45,44.675) 169.95,44.175 C2.1 172.275,42.7 170.15,40.575 Q2.2 172.4,39.75 v1(173.1,40.45)
  Bottom Layer w0.254: P15.8 137.04,45.34 136.8,45.1 136.8,44.65 139.15,42.3 147.5,42.3 149.875,44.675 v1(169.45,44.675) ; v1(166.875,34.3) 166.875,34.4 167.425,34.95 171.275,34.95 173.1,36.775 v1(173.1,40.45)
IO1: P2.10 U1.39 | length 9.7
  Top Layer w0.254: U1.39 141.1,75.125 143.145,77.17 P2.10
IO2: P2.9 U1.38 | length 9.2
  Top Layer w0.254: U1.38 143.48,73.855 144.255,74.63 P2.9
IO3: P14.11 U1.15 | length 11.6
  Top Layer w0.254: P14.11 115.485,51.785 120.875,57.175 U1.15
IO16: P14.5 U1.9 | length 6.5
  Top Layer w0.254: P14.5 113.06,66.925 114.425,66.925 115.115,66.235 U1.9
IO17: P14.6 U1.10 | length 6.3
  Top Layer w0.254: P14.6 116.785,64.485 117.225,64.925 119.07,64.925 U1.10
IO18: P14.7 U1.11 | length 6.9
  Top Layer w0.254: P14.7 115.195,61.945 116.945,63.695 U1.11
IO19: P14.9 U1.13 | length 8.4
  Top Layer w0.254: P14.9 114.29,56.865 116,58.575 116,59.45 117.705,61.155 U1.13
IO20: P14.10 U1.14 | length 9.1
  Top Layer w0.254: P14.10 117.025,58.39 117.025,59.55 117.36,59.885 U1.14
IO21: P15.4 U1.23 | length 13.4
  Top Layer w0.254: P15.4 126.88,52.28 131.035,56.435 U1.23
IO33: P15.5 U1.24 | length 12.9
  Top Layer w0.254: P15.5 129.42,53.37 132.305,56.255 U1.24
IO45: P15.7 U1.26 | length 11.8
  Top Layer w0.254: P15.7 134.485,46.975 134.485,48.76 134.845,49.12 U1.26
IO46: P14.12 U1.16 | length 14
  Top Layer w0.254: P14.12 114.27,49.245 122.2,57.175 122.2,58.58 U1.16
NetC3_2: C3.2 U3.4 | length 13
  Top Layer w0.254: U3.4 182.231,57.1 184.175,57.1 184.275,57 184.3,57 186.075,55.225 186.075,50.3 183.8,48.025 C3.2
NetC5_1: C5.1 U3.7 Y1.2 | length 15.5
  Top Layer w0.254: U3.7 182.256,60.825 183.8,60.825 184.95,61.975 184.95,67.465 Y1.2 183.765,70.465 184.625,71.325 184.625,73.25 C5.1
NetC6_1: C6.1 U3.8 Y1.1 | length 15
  Top Layer w0.254: C6.1 178.885,73.515 Y1.1 182.41,65.125 183.225,65.125 183.575,64.775 183.575,62.374 183.351,62.15 U3.8
NetC17_1: C17.1 S1.2 VR1.3 | length 29.6
  Top Layer w0.254: C17.1 122.233,23.65 v1(125.9,23.65) ; VR1.3 134.475,25.7 134.475,23.55 134.95,23.075 139.226,23.075 139.653,23.502 139.653,24.01 140.385,24.742 S1.2
  Bottom Layer w0.254: v1(125.9,23.65) 138.91,23.65 S1.2
NetC20_1: C20.1 R16.2 U8.4 | length 36.4
  Top Layer w0.254: C20.1 110.379,14.604 111.252,13.731 115.669,13.731 117.3,12.1 123.45,12.1 127.15,8.4 128.575,8.4 128.9,8.725 129,8.725 ; R16.2 128.45,9.275 129,8.725 ; v1(129.8,8.725) 129,8.725 ; v1(131.725,15.075) 132.375,14.425 132.375,14.1 131.975,13.7 131.975,12.975 132,12.95 132,12.899 132.149,12.75 U8.4
  Bottom Layer w0.254: v1(129.8,8.725) 131.025,9.95 131.025,14.45 131.575,15 131.65,15 v1(131.725,15.075)
NetD1_1: D1.1 U2.A4 U2.A9 U2.B4 U2.B9 | length 24.8
  Top Layer w0.254: D1.1 189.65,49.575 189.65,58.175 189.884,58.409 U2.A4 191.364,58.386 191.963,58.386 192.174,58.175 192.725,58.175 U2.B9 195.559,58.159 196.15,58.75 196.15,60.1 195.591,60.659 U2.B4 192.718,60.682 192.052,60.682 191.899,60.835 191.848,60.886 191.364,60.886 U2.A9
NetP3_4: P3.4 U3.10 | length 6
  Top Layer w0.254: P3.4 170.983,61.175 173.4,61.175 173.695,60.88 U3.10
NetP3_5: P3.5 U3.9 | length 6.4
  Top Layer w0.254: P3.5 172.927,63.623 174.4,62.15 U3.9
NetP6_1: P6.1 U4.1 | length 41
  Top Layer w0.254: P6.1 27,15.125 27.7,14.425 52,14.425 52.709,15.134 U4.1
NetP6_2: P6.2 U4.12 | length 5.8
  Top Layer w0.254: P6.2 24.614,19.778 24.614,25.174 U4.12
NetP6_3: P6.3 U4.13 | length 5.8
  Top Layer w0.254: P6.3 22.074,19.778 22.074,25.174 U4.13
NetP7_1: P7.1 U4.7 | length 5.9
  Top Layer w0.254: P7.1 37.469,20.093 U4.7
NetP7_2: P7.2 U4.6 | length 5.9
  Top Layer w0.254: P7.2 39.54,24.514 40.009,24.983 U4.6
NetP7_3: P7.3 U4.5 | length 5.9
  Top Layer w0.254: P7.3 42.08,24.514 42.549,24.983 U4.5
NetP7_4: P7.4 U4.4 | length 5.9
  Top Layer w0.254: P7.4 44.62,24.514 45.089,24.983 U4.4
NetP7_5: P7.5 U4.3 | length 5.9
  Top Layer w0.254: P7.5 47.16,24.514 47.629,24.983 U4.3
NetP7_6: P7.6 U4.2 | length 5.9
  Top Layer w0.254: P7.6 49.7,24.514 50.169,24.983 U4.2
NetP13_2: P13.2 R16.1 R17.2 | length 29.8
  Top Layer w0.254: R16.1 128.525,13.465 128.525,14.975 128.9,15.35 ; P13.2 130.55,19.1 128.9,17.45 128.9,15.35 ; R17.2 141.435,6.8 132.925,6.8 130.95,8.775 130.95,13.725 130.995,13.77 129.415,15.35 128.9,15.35
NetQ1_1: Q1.1 R1.2 | length 9.6
  Top Layer w0.254: R1.2 159.225,45.475 158.4,44.65 158.4,41.95 159.975,40.375 Q1.1
NetQ2_1: Q2.1 R2.2 | length 6.6
  Top Layer w0.254: Q2.1 173.825,38.45 175.61,40.235 R2.2
NetR3_2: R3.2 U6.9 | length 107
  Top Layer w0.254: U6.9 27.781,33.381 32.219,37.819 32.219,38.261 33.283,39.325 34.7,39.325 36.975,41.6 54.15,41.6 56.425,43.875 62.45,43.875 88.956,70.381 R3.2
NetR13_1: R13.1 R14.2 | length 7.5
  Top Layer w0.254: R13.1 156.225,32.775 157.1,31.9 R14.2
NetR14_1: R14.1 R15.2 | length 10.3
  Top Layer w0.254: R15.2 151.35,21.875 152.225,21 156.575,21 157.1,21.525 R14.1
NFAULT: P14.13 U1.17 | length 16.9
  Top Layer w0.254: P14.13 114.105,46.705 114.475,47.075 114.475,47.875 123.415,56.815 U1.17
NFAULT_2: P14.4 U1.8 | length 7
  Top Layer w0.254: P14.4 114.46,69.565 116.52,67.505 U1.8
NSLEEP: P14.8 U1.12 | length 7.7
  Top Layer w0.254: P14.8 114.155,60.6 115.45,60.6 117.275,62.425 U1.12 U1.12@118.885,62.2
NSLEEP_2: P15.3 U1.22 | length 13.9
  Top Layer w0.254: P15.3 124.34,50.715 129.765,56.14 U1.22
RI: P3.3 U3.11 | length 6.3
  Top Layer w0.254: P3.3 172.893,58.543 173.96,59.61 U3.11
RS232: P3.1 U3.15 | length 6.4
  Top Layer w0.254: P3.1 171.08,53.275 173.95,53.275 175.205,54.53 U3.15
RST: Q1.2 R2.1 U3.14 | length 47.9
  Top Layer w0.254: v1(159.225,37.525) 159.225,38.6 159.575,38.95 161.6,38.95 Q1.2 ; v1(166.6,37.425) 166.7,37.325 167.075,37.325 167.15,37.25 173.625,37.25 173.875,37.5 175.9,37.5 176.125,37.725 177.675,37.725 179.9,39.95 179.9,41.375 178.035,43.24 R2.1 175.775,43.49 v1(175.775,45.75) ; v1(174.825,55.375) 175.25,55.8 U3.14
  Bottom Layer w0.254: v1(159.225,37.525) 159.225,36.725 159.675,36.275 163.6,36.275 164.75,37.425 v1(166.6,37.425) ; v1(174.825,55.375) 174.825,46.7 v1(175.775,45.75)
UART1: P2.7 U1.36 U3.2 | length 61.7
  Top Layer w0.254: U1.36 141.705,71.315 143.61,69.41 145.345,69.41 P2.7 ; v1(152,69.075) 152,67.65 169,50.65 182.55,50.65 184.1,52.2 184.1,54.25 183.82,54.53 U3.2
  Bottom Layer w0.254: P2.7 151.525,69.55 v1(152,69.075)
UART2: P2.8 U1.37 U3.3 | length 67.9
  Top Layer w0.254: U1.37 136.735,72.46 139.085,72.46 139.455,72.09 P2.8 149.226,72.09 149.375,71.941 149.375,67.5 167.1,49.775 182.925,49.775 185.15,52 185.15,55.125 184.475,55.8 U3.3
VCC: C4.2 C18.1 C19.1 D1.2 P1.1 P11.3 R12.2 U3.16 U4.15 U6.1 U6.8 U8.1 U8.3 VR1.2 VR1.4 | length 360.5
  Top Layer w0.254: v1(3,39.775) 2.925,39.775 2.325,39.175 2.325,37.325 3.738,35.912 4.85,35.912 U6.8 ; U4.15 19.021,27.2 35.625,27.2 36.3,27.875 42.875,27.875 44.075,29.075 64.025,29.075 64.175,29.225 88.625,29.225 95.65,22.2 103.675,22.2 104.106,22.631 108.506,22.631 C18.1@109.379,23.504 ; v1(102.15,76.35) 102.15,55.9 103.325,54.725 103.325,54.7 103.675,54.35 103.675,51.925 103.009,51.259 103.009,51.049 103.061,50.997 103.061,50.786 102.675,50.4 102.675,37.175 103.15,36.7 103.275,36.7 v1(103.35,36.625) ; v1(103.525,26.7) 104.325,25.9 104.325,25.475 105.296,24.504 C18.1 C18.1@109.379,23.504 ; v1(130.375,16.45) 130.425,16.4 133.25,16.4 134.575,15.075 134.675,15.075 136.125,13.625 U8.3 138.375,12.75 139.15,11.975 v1(139.15,10.575) 137.9,10.575 137.625,10.85 U8.1 ; R12.2 139.8,32.525 136.425,35.9 ; v1(145.55,37.2) 137.725,37.2 136.425,35.9 ; v1(176.375,51.675) 175.9,51.675 175.45,52.125 175.45,52.8 175.727,53.077 176.518,53.077 U3.16 ; v1(179.6,45.675) 184.75,40.525 ; v1@180.343,37.918 182.95,40.525 184.75,40.525 ; C4.2 187.75,40.475 D1.2 184.75,40.525 ; C18.1@109.379,23.504 109.379,21.371 111.5,19.25 115.65,19.25 117.423,17.477 120.506,17.477 121.379,16.604 C19.1 121.458,15.525 123.225,15.525 125.25,17.55 v1(126.4,17.55) 127.35,18.5 127.75,18.5 132.15,22.9 VR1.2 VR1.4 132.15,35.15 132.9,35.9 136.425,35.9
  Bottom Layer w0.254: v1(3,39.775) 3,52.5 2.955,52.545 3.738,53.328 4.828,53.328 U6.1 ; U6.8 6.596,35.881 U4.15 ; v1(102.15,76.35) 102.575,76.775 104.525,76.775 104.635,76.885 P1.1 ; v1(103.35,36.625) 103.35,26.925 103.525,26.75 v1(103.525,26.7) ; v1(126.4,17.55) 127.5,16.45 v1(130.375,16.45) ; P11.3 136.23,6.455 139.325,9.55 139.325,10.4 v1(139.15,10.575) ; v1(145.55,37.2) 147.2,35.55 159.2,35.55 161.6,33.15 167.65,33.15 168.5,34 176.65,34 v1(180.35,37.7) ; v1(176.375,51.675) 178.95,49.1 178.95,46.325 v1(179.6,45.675)
VMOT: P5.1 P5.2 S1.1 | length 31.9
  Bottom Layer w0.254: S1.1 145.375,25.035 145.375,23.024 145.524,22.875 146.175,22.875 150.675,18.375 150.675,9.3 P5.1 152.625,7.4 152.625,11.375 152.85,11.6 154.93,11.6 155.14,11.39 P5.2
pads on no net: SW1.2 SW1.3 SW2.2 SW2.3 U2. U2.A2 U2.A3 U2.A5 U2.A8 U2.A10 U2.A11 U2.B2 U2.B3 U2.B5 U2.B8 U2.B10 U2.B11 U4. U6.

## Polygon pours and split planes (outlines as drawn)
3V3 on Top Layer "3V3_L01_P000" (solid, pour order 0): 1,79.5 1,1 199,1 199,79.5
GND on Bottom Layer "GND_L02_P001" (solid, pour order 1): 1,79.5 1,1 199,1 199,79.5

## Silkscreen, mask and mechanical layers (free items; w line width, h text height)
Top Overlay:
  text "RESET" at 167.254,21.754 h1.52
  text "EN" at 185.754,21.754 h1.52
  text "V+" at 157.254,8.254 h1.52
  text "VCC" at 135.754,6.754 h1.52
  text "GND" at 124.754,3.754 h1.52
  text "GND" at 157.254,2.754 h1.52
  text "3V3" at 131.754,1.254 h1.52

## Text inside footprints (layer, text, board x,y; h text height)
P5: Top Overlay "1" at 152.092,9.407 h1.27 r270; Top Overlay "2" at 154.632,9.915 h1.27 r270; Top Overlay "4" at 154.632,3.311 h1.27 r270; Top Overlay "3" at 152.092,3.311 h1.27 r270